# Altium PCB Christmas-2024_TSO-PCB.PcbDoc
Units mil, origin at the board's own origin, x right, y up, seen from the top; angles counter-clockwise.
Board outline 6000 x 4000 mil, 2 copper layers (Top Layer, Bottom Layer); 129 components, 96 nets, 375 pads, 0 vias.
Unrouted connection lines stored in the file: 250.
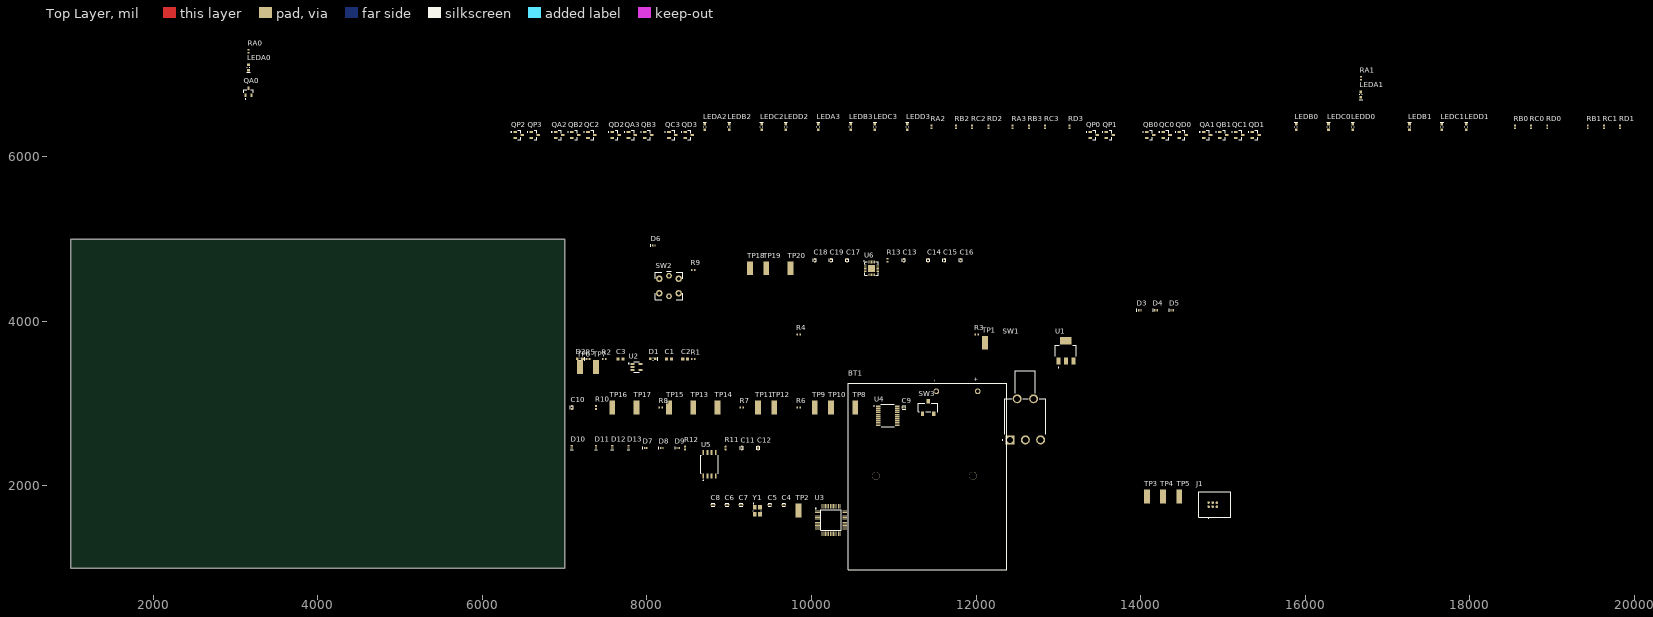
[diagram p0: Top Layer view]
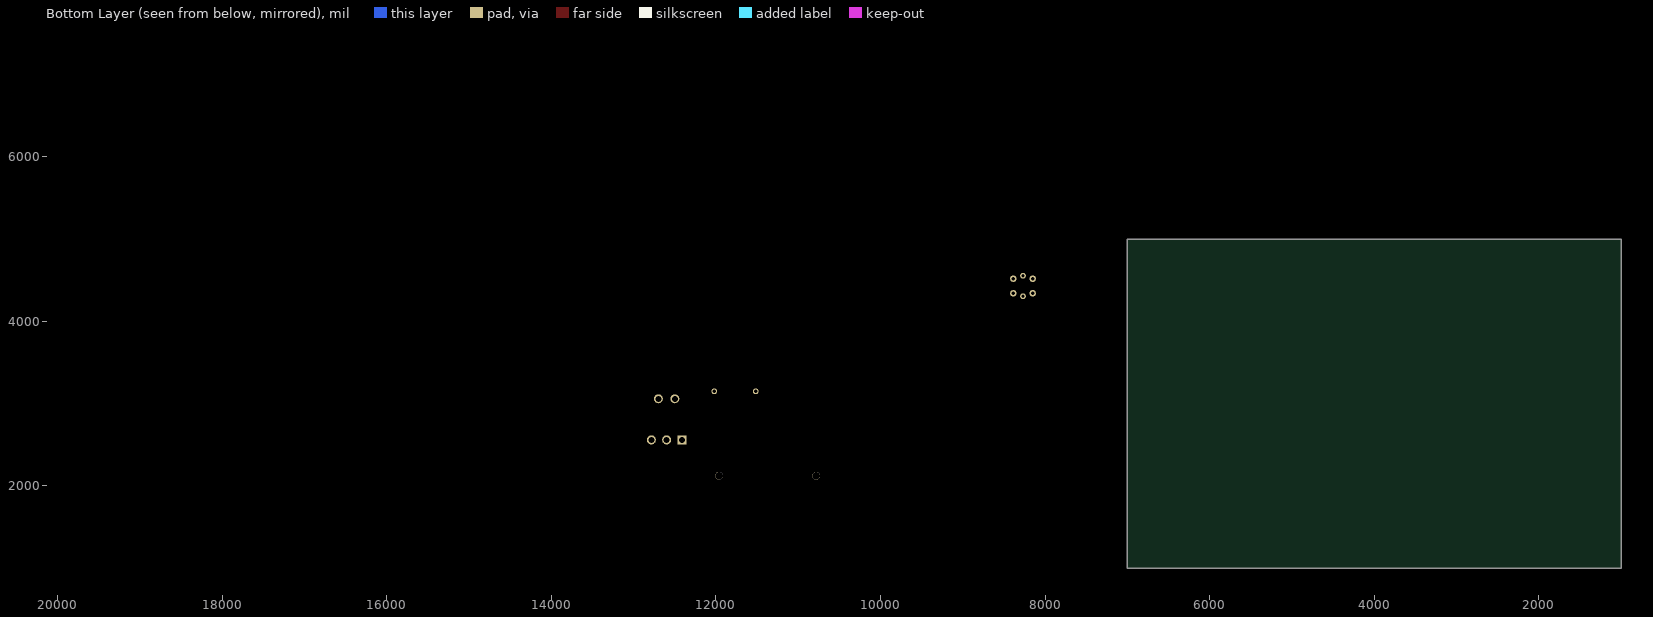
[diagram p1: Bottom Layer view, seen from below]

## Layer stack, top to bottom
Top Solder: solder mask 0.4, Solder Resist, Dk 3.5
Top Layer: signal copper 1.4
Dielectric 1: dielectric 12.6, FR-4, Dk 4.8
Bottom Layer: signal copper 1.4
Bottom Solder: solder mask 0.4, Solder Resist, Dk 3.5

## Board outline
1000,1000 7000,1000 7000,5000 1000,5000

## Design rules (kind name [scope] priority, off if disabled: settings)
Clearance [All] p1: gap=10 ignorepadtopadclearanceinfootprint=FALSE except(0: Arc-Hole Track-Hole SMDPad-Hole THPad-Hole Via-Hole Fill-Hole Poly-Hole Region-Hole Text-Hole)
PolygonConnect [All] p1: connectstyle=Relief reliefconductorwidth=10 reliefentries=4 polygonreliefangle="90 Angle" airgapwidth=10
RoomDefinition SWD [InComponentClass('SWD')] p1: confinementstyle=ConfineIn formatcopy=TRUE lockcomponents=FALSE outline 13929.93,4101.19 13929.93,4168.5 14424.4,4168.5 14424.4,1977.52 15145.83,1977.52 15145.83,1567.76 14653.39,1567.76 14653.39,1767.56 14022.48,1767.56 14022.48,4101.19
RoomDefinition PWR [InComponentClass('PWR')] p2: confinementstyle=ConfineIn formatcopy=TRUE lockcomponents=FALSE outline 7116.97,3506.73 7116.97,3579.88 7607.72,3579.88 7607.72,3583.23 9794.13,3583.23 9794.13,3871.22 12056.26,3871.22 12056.26,3843.66 12158.62,3843.66 12158.62,3830.28 12869.25,3830.28 12869.25,3827.91 13239.33,3827.91 13239.33,3423.07 12869.25,3423.07 12869.25,2483.6 12394.84,2483.6 12394.84,960.67 10424.06,960.67 10424.06,3341.38 7132.72,3341.38 7132.72,3506.73
RoomDefinition Memory-Buffer [InComponentClass('Memory-Buffer')] p3: confinementstyle=ConfineIn formatcopy=TRUE lockcomponents=FALSE outline 7054.37,2908.31 7054.37,2997.2 7349.25,2997.2 7349.25,3001.14 7526.42,3001.14 7526.42,3056.26 11284.21,3056.26 11284.21,3069.12 11550.43,3069.12 11550.43,2836.39 11090.71,2836.39 11090.71,2703.58 10740,2703.58 10740,2849.25 7526.42,2849.25 7526.42,2904.37 7349.25,2904.37 7349.25,2908.31
RoomDefinition MCU [InComponentClass('MCU')] p4: confinementstyle=ConfineIn formatcopy=TRUE lockcomponents=FALSE outline 8758.15,1739.41 8758.15,1803.9 9267.64,1803.9 9267.64,1805.08 9790.28,1805.08 9790.28,1805.16 9894.92,1805.16 9894.92,1803.35 10454.29,1803.35 10454.29,1369.96 10020.91,1369.96 10020.91,1598.15 9790.28,1598.15 9790.28,1604.96 9267.64,1604.96 9267.64,1739.41
RoomDefinition LEDs [InComponentClass('LEDs')] p5: confinementstyle=ConfineIn formatcopy=TRUE lockcomponents=FALSE outline 3080.36,6682.11 3080.36,6872.98 3121.7,6872.98 3121.7,7151.92 3125.63,7151.92 3125.63,7329.08 3190.91,7329.08 3190.91,7151.92 3194.84,7151.92 3194.84,7000.55 16708.62,7000.55 16708.62,6823.39 16712.56,6823.39 16712.56,6434.11 17992.09,6434.11 17992.09,6410 19858.23,6410 19858.23,6313.23 17992.09,6313.23 17992.09,6293.54 15480.87,6293.54 15480.87,6185.28 6333.31,6185.28 6333.31,6682.11
RoomDefinition Flash-Memory [InComponentClass('Flash-Memory')] p6: confinementstyle=ConfineIn formatcopy=TRUE lockcomponents=FALSE outline 7052.96,2414.18 7052.96,2514.95 7809.24,2514.95 7809.24,2509.02 8989.33,2509.02 8989.33,2505.08 9382.64,2505.08 9382.64,2416.18 8989.33,2416.18 8989.33,2412.24 8881.84,2412.24 8881.84,2050.78 8637.84,2050.78 8637.84,2412.24 8431.93,2412.24 8431.93,2414.18
RoomDefinition Button [InComponentClass('Button')] p7: confinementstyle=ConfineIn formatcopy=TRUE lockcomponents=FALSE outline 8024.42,4887.61 8024.42,4954.91 8125.19,4954.91 8125.19,4658.62 8611.38,4658.62 8611.38,4593.35 8448.98,4593.35 8448.98,4247.87 8086.46,4247.87 8086.46,4887.61
RoomDefinition Amplifier [InComponentClass('Amplifier')] p8: confinementstyle=ConfineIn formatcopy=TRUE lockcomponents=FALSE outline 9199.65,4539.41 9199.65,4746.42 10007.13,4746.42 10007.13,4785.79 10892.56,4785.79 10892.56,4789.72 10957.83,4789.72 10957.83,4785.79 11843.27,4785.79 11843.27,4696.89 10957.83,4696.89 10957.83,4692.95 10833.85,4692.95 10833.85,4537.41 10619.72,4537.41 10619.72,4539.41
RoutingVias [All] p1: holewidth=28 width=50 viastyle="Through Hole" minholewidth=28 minwidth=50 maxholewidth=28 maxwidth=50
SolderMaskExpansion [All] p1: expansion=4 istentingtop=FALSE
Width [All] p1: maxlimit=10 minlimit=10 preferedwidth=10
30 further rules are at their usual default settings.

## Classes and differential pairs
component class Memory-Buffer: C9 C10 R6 R7 R8 R10 SW3 TP8 TP9 TP10 TP11 TP12 TP13 TP14 TP15 TP16 TP17 U4
component class Flash-Memory: C11 C12 D7 D8 D9 D10 D11 D12 D13 R11 R12 U5
component class Amplifier: C13 C14 C15 C16 C17 C18 C19 R13 SP1 TP18 TP19 TP20 U6
component class SWD: D3 D4 D5 J1 TP3 TP4 TP5
component class Button: D6 R9 SW2
component class LEDs: LEDA0 LEDA1 LEDA2 LEDA3 LEDB0 LEDB1 LEDB2 LEDB3 LEDC0 LEDC1 LEDC2 LEDC3 LEDD0 LEDD1 LEDD2 LEDD3 QA0 QA1 QA2 QA3 QB0 QB1 QB2 QB3 QC0 QC1 QC2 QC3 QD0 QD1 QD2 QD3 QP0 QP1 QP2 QP3 RA0 RA1 RA2 RA3 RB0 RB1 RB2 RB3 RC0 RC1 RC2 RC3 RD0 RD1 RD2 RD3
component class PWR: BT1 C1 C2 C3 D1 D2 R1 R2 R3 R4 R5 SW1 TP1 TP6 TP7 U1 U2
component class MCU: C4 C5 C6 C7 C8 TP2 U3 Y1

## Components (designator, comment, footprint, x,y, rotation, side; value= is the part's Value field where it differs from the comment)
BT1 "BC3AAPC" BAT_BC3AAPC 11409.45,2113.39 r90 top
C1 "CAP" 0603C 8267.72,3543.31 r0 top value=10uF
C2 "CAP" 0603C 8464.57,3543.31 r0 top value=10uF
C3 "CAP" 0603C 7677.17,3543.31 r0 top value=10uF
C4 "CAP" 0402C 9662.6,1771.65 r0 top value=0.1uF
C5 "CAP" 0402C 9492.6,1771.65 r0 top value=4pF
C6 "CAP" 0402C 8972.6,1771.65 r0 top value=0.1uF
C7 "CAP" 0402C 9142.6,1771.65 r0 top value=4.7uF
C8 "CAP" 0402C 8802.6,1771.65 r0 top value=4pF
C9 "CAP" 0402C 11122.05,2952.76 r0 top value=0.1uF
C10 "CAP" 0402C 7086.61,2952.76 r90 top value=0.1uF
C11 "CAP" 0402C 9153.54,2460.63 r90 top value=0.1uF
C12 "CAP" 0402C 9350.39,2460.63 r90 top value=4.7uF
C13 "CAP" 0402C 11122.05,4741.34 r90 top value=0.1uF
C14 "CAP" 0402C 11417.32,4741.34 r90 top value=0.1uF
C15 "CAP" 0402C 11614.17,4741.34 r90 top value=4.7uF
C16 "CAP" 0402C 11811.02,4741.34 r90 top value=4.7uF
C17 "CAP" 0402C 10433.07,4741.34 r90 top value=DNS
C18 "CAP" 0402C 10039.37,4741.34 r90 top value=DNS
C19 "CAP" 0402C 10236.22,4741.34 r90 top value=DNS
D1 "LED - GREEN" "LED - 0603 - GREEN" 8070.87,3543.31 r0 top
D2 "LED - RED" "LED - 0603 - RED" 7185.04,3543.31 r0 top
D3 "DESD3V3E1BL-7B" 0402-TVS 13976.38,4134.84 r0 top
D4 "DESD3V3E1BL-7B" 0402-TVS 14173.23,4134.84 r0 top
D5 "DESD3V3E1BL-7B" 0402-TVS 14370.08,4134.84 r0 top
D6 "DESD3V3E1BL-7B" 0402-TVS 8070.87,4921.26 r0 top
D7 "DESD3V3E1BL-7B" 0402-TVS 7972.44,2460.63 r0 top
D8 "DESD3V3E1BL-7B" 0402-TVS 8169.29,2460.63 r0 top
D9 "DESD3V3E1BL-7B" 0402-TVS 8366.14,2460.63 r0 top
D10 "DESD3V3E1BL-7B" 0402-TVS 7086.61,2460.63 r90 top
D11 "DESD3V3E1BL-7B" 0402-TVS 7381.89,2460.63 r90 top
D12 "DESD3V3E1BL-7B" 0402-TVS 7578.74,2460.63 r90 top
D13 "DESD3V3E1BL-7B" 0402-TVS 7775.59,2460.63 r90 top
J1 "TC2030-IDC" "TAG CONNECT TC2030IDC - NO 3D MODEL" 14862.2,1772.64 r0 top value=DNS
LEDA0 "LED - ORANGE" "LED - 0603 - ORANGE" 3158.27,7083.85 r270 top
LEDA1 "LED - ORANGE" "LED - 0603 - ORANGE" 16675.98,6755.31 r270 top
LEDA2 "LED - ORANGE" "LED - 0603 - ORANGE" 8703.54,6361.61 r90 top
LEDA3 "LED - ORANGE" "LED - 0603 - ORANGE" 10081.5,6361.61 r90 top
LEDB0 "LED - BLUE" "LED - 0603 - BLUE" 15888.58,6361.61 r90 top
LEDB1 "LED - BLUE" "LED - 0603 - BLUE" 17266.54,6361.61 r90 top
LEDB2 "LED - BLUE" "LED - 0603 - BLUE" 8998.82,6361.61 r90 top
LEDB3 "LED - BLUE" "LED - 0603 - BLUE" 10475.2,6361.61 r90 top
LEDC0 "LED - RED" "LED - 0603 - RED" 16282.28,6361.61 r90 top
LEDC1 "LED - RED" "LED - 0603 - RED" 17660.24,6361.61 r90 top
LEDC2 "LED - RED" "LED - 0603 - RED" 9392.52,6361.61 r90 top
LEDC3 "LED - RED" "LED - 0603 - RED" 10770.47,6361.61 r90 top
LEDD0 "LED - YELLOW" "LED - 0603" 16577.56,6361.61 r90 top
LEDD1 "LED - YELLOW" "LED - 0603" 17955.51,6361.61 r90 top
LEDD2 "LED - YELLOW" "LED - 0603" 9687.8,6361.61 r90 top
LEDD3 "LED - YELLOW" "LED - 0603" 11164.17,6361.61 r90 top
QA0 "NMOS" SOT-23 3158.27,6788.57 r90 top
QA1 "NMOS" SOT-23 14805.91,6263.19 r0 top
QA2 "NMOS" SOT-23 6931.89,6263.19 r0 top
QA3 "NMOS" SOT-23 7817.72,6263.19 r0 top
QB0 "NMOS" SOT-23 14116.93,6263.19 r0 top
QB1 "NMOS" SOT-23 15002.76,6263.19 r0 top
QB2 "NMOS" SOT-23 7128.74,6263.19 r0 top
QB3 "NMOS" SOT-23 8014.57,6263.19 r0 top
QC0 "NMOS" SOT-23 14313.78,6263.19 r0 top
QC1 "NMOS" SOT-23 15199.61,6263.19 r0 top
QC2 "NMOS" SOT-23 7325.59,6263.19 r0 top
QC3 "NMOS" SOT-23 8309.84,6263.19 r0 top
QD0 "NMOS" SOT-23 14510.63,6263.19 r0 top
QD1 "NMOS" SOT-23 15396.46,6263.19 r0 top
QD2 "NMOS" SOT-23 7620.87,6263.19 r0 top
QD3 "NMOS" SOT-23 8506.69,6263.19 r0 top
QP0 "NMOS" SOT-23 13427.95,6263.19 r0 top
QP1 "NMOS" SOT-23 13624.8,6263.19 r0 top
QP2 "NMOS" SOT-23 6439.76,6263.19 r0 top
QP3 "NMOS" SOT-23 6636.61,6263.19 r0 top
R1 "RES" 0402R 8562.99,3543.31 r0 top value=160k
R2 "RES" 0402R 7480.32,3543.31 r0 top value=200k
R3 "RES" 0402R 12007.87,3838.58 r0 top value=10k
R4 "RES" 0402R 9842.52,3838.58 r0 top value=5
R5 "RES" 0402R 7283.46,3543.31 r0 top value=4.7k
R6 "RES" 0402R 9842.52,2952.76 r0 top value=22
R7 "RES" 0402R 9153.54,2952.76 r0 top value=22
R8 "RES" 0402R 8169.29,2952.76 r0 top value=22
R9 "RES" 0402R 8562.99,4625.98 r0 top value=2.2k
R10 "RES" 0402R 7381.89,2952.76 r90 top value=4.7k
R11 "RES" 0402R 8956.69,2460.63 r90 top value=4.7k
R12 "RES" 0402R 8464.57,2460.63 r90 top value=4.7k
R13 "RES" 0402R 10925.2,4741.34 r90 top value=100k
RA0 "RES" 0402R 3158.27,7280.7 r90 top value=260
RA1 "RES" 0402R 16675.98,6952.17 r90 top value=260
RA2 "RES" 0402R 11459.45,6361.61 r90 top value=260
RA3 "RES" 0402R 12443.7,6361.61 r90 top value=260
RB0 "RES" 0402R 18546.06,6361.61 r90 top value=20
RB1 "RES" 0402R 19431.89,6361.61 r90 top value=20
RB2 "RES" 0402R 11754.72,6361.61 r90 top value=20
RB3 "RES" 0402R 12640.55,6361.61 r90 top value=20
RC0 "RES" 0402R 18742.91,6361.61 r90 top value=260
RC1 "RES" 0402R 19628.74,6361.61 r90 top value=260
RC2 "RES" 0402R 11951.57,6361.61 r90 top value=260
RC3 "RES" 0402R 12837.4,6361.61 r90 top value=260
RD0 "RES" 0402R 18939.76,6361.61 r90 top value=260
RD1 "RES" 0402R 19825.59,6361.61 r90 top value=260
RD2 "RES" 0402R 12148.43,6361.61 r90 top value=260
RD3 "RES" 0402R 13132.68,6361.61 r90 top value=260
SW1 "SPDT TOGGLE SWITCH" SW_100SP1T2B4M6QE 12598.43,2559.06 r0 top
SW2 "SPDT PUSH BUTTON SWITCH" TL1265RQSCLR 8267.72,4429.13 r0 top
SW3 "SPDT SLIDE SWITCH" CJS-1200TB 11417.32,2952.76 r0 top
TP1 "RCWCTE" RCWCTE 12106.3,3740.16 r90 top
TP2 "RCWCTE" RCWCTE 9842.6,1701.65 r90 top
TP3 "RCWCTE" RCWCTE 14074.8,1871.06 r90 top
TP4 "RCWCTE" RCWCTE 14271.65,1871.06 r90 top
TP5 "RCWCTE" RCWCTE 14468.5,1871.06 r90 top
TP6 "RCWCTE" RCWCTE 7185.04,3444.88 r90 top
TP7 "RCWCTE" RCWCTE 7381.89,3444.88 r90 top
TP8 "RCWCTE" RCWCTE 10531.5,2952.76 r90 top
TP9 "RCWCTE" RCWCTE 10039.37,2952.76 r90 top
TP10 "RCWCTE" RCWCTE 10236.22,2952.76 r90 top
TP11 "RCWCTE" RCWCTE 9350.39,2952.76 r90 top
TP12 "RCWCTE" RCWCTE 9547.24,2952.76 r90 top
TP13 "RCWCTE" RCWCTE 8562.99,2952.76 r90 top
TP14 "RCWCTE" RCWCTE 8858.27,2952.76 r90 top
TP15 "RCWCTE" RCWCTE 8267.72,2952.76 r90 top
TP16 "RCWCTE" RCWCTE 7578.74,2952.76 r90 top
TP17 "RCWCTE" RCWCTE 7874.02,2952.76 r90 top
TP18 "RCWCTE" RCWCTE 9251.97,4642.91 r90 top
TP19 "RCWCTE" RCWCTE 9448.82,4642.91 r90 top
TP20 "RCWCTE" RCWCTE 9744.09,4642.91 r90 top
U1 "AZ1117IH-3.3TRG1" SOT-223-3 13090.55,3641.73 r90 top
U2 "2.0V" SOT-23-5 7874.02,3444.88 r0 top
U3 "STM32G031C8T6" 48-LQFP 10237.6,1586.65 r0 top
U4 "74LVC244APW,118" 20-TSSOP 10925.2,2854.33 r0 top
U5 "WINBOND NOR FLASH MEM" 8-SOIC 8759.84,2263.78 r90 top
U6 "NAU8315YG" 20-WFQFN-EP 10728.35,4642.91 r0 top
Y1 "16MHz" 4-SMD_NL 9342.6,1696.65 r0 top

## Footprints (in the part's own frame and the unit in brackets; to place one, negate y for a bottom-side part, rotate by r counter-clockwise, add the part's x,y. Pads: shape width x height; smd on the part's side, far side on the other; paste and mask are expansions set on the pad)
4-SMD_NL [mm]
  rect 1.15x1.4 smd: 1(-0.8,1.1) 2(-0.8,-1.1) 3(0.8,-1.1) 4(0.8,1.1)
  silkscreen extent -1.3,-0.08 1.25,2.4, body extent -1.25,-1.6 1.25,1.6, height 0.75
8-SOIC [mil]
  rect 60x21 smd paste+0: 1(-143.5,75) 2(-143.5,25) 3(-143.5,-25) 4(-143.5,-75) 5(143.5,-75) 6(143.5,-25) 7(143.5,25) 8(143.5,75)
  silkscreen extent -198,-109 109,109, body extent -156,-104 156,104, height 85
20-TSSOP [mm]
  rrect50% 1.475x0.45 smd mask+0.051: 1(-2.938,2.925) 2(-2.938,2.275) 3(-2.938,1.625) 4(-2.938,0.975) 5(-2.938,0.325) 6(-2.938,-0.325) 7(-2.938,-0.975) 8(-2.938,-1.625) 9(-2.938,-2.275) 10(-2.938,-2.925) 11(2.938,-2.925) 12(2.938,-2.275) 13(2.938,-1.625) 14(2.938,-0.975) 15(2.938,-0.325) 16(2.938,0.325) 17(2.938,0.975) 18(2.938,1.625) 19(2.938,2.275) 20(2.938,2.925)
  silkscreen extent -4.3,-3.5 2.05,3.5, body extent -3.2,-3.25 3.2,3.25, height 1.13
20-WFQFN-EP [mm]
  rect 0.85x0.28 smd mask+0.051: 1(-1.95,1) 2(-1.95,0.5) 3(-1.95,0) 4(-1.95,-0.5) 5(-1.95,-1) 11(1.95,-1) 12(1.95,-0.5) 13(1.95,0) 14(1.95,0.5) 15(1.95,1)
  rect 0.28x0.85 smd mask+0.051: 6(-1,-1.95) 7(-0.5,-1.95) 8(0,-1.95) 9(0.5,-1.95) 10(1,-1.95) 16(1,1.95) 17(0.5,1.95) 18(0,1.95) 19(-0.5,1.95) 20(-1,1.95)
  rect 2.1x2.1 smd mask+0.051: 21(0,0)
  silkscreen extent -2.38,-2.1 2.1,2.38, body extent -2.05,-2.05 2.05,2.05, height 0.8
48-LQFP [mm]
  rect 1.475x0.28 smd mask+0.03: 1(-4.238,2.75) 2(-4.238,2.25) 3(-4.238,1.75) 4(-4.238,1.25) 5(-4.238,0.75) 6(-4.238,0.25) 7(-4.238,-0.25) 8(-4.238,-0.75) 9(-4.238,-1.25) 10(-4.238,-1.75) 11(-4.238,-2.25) 12(-4.238,-2.75) 25(4.238,-2.75) 26(4.238,-2.25) 27(4.238,-1.75) 28(4.238,-1.25) 29(4.238,-0.75) 30(4.238,-0.25) 31(4.238,0.25) 32(4.238,0.75) 33(4.238,1.25) 34(4.238,1.75) 35(4.238,2.25) 36(4.238,2.75)
  rect 0.28x1.475 smd mask+0.03: 13(-2.75,-4.238) 14(-2.25,-4.238) 15(-1.75,-4.238) 16(-1.25,-4.238) 17(-0.75,-4.238) 18(-0.25,-4.238) 19(0.25,-4.238) 20(0.75,-4.238) 21(1.25,-4.238) 22(1.75,-4.238) 23(2.25,-4.238) 24(2.75,-4.238) 37(2.75,4.238) 38(2.25,4.238) 39(1.75,4.238) 40(1.25,4.238) 41(0.75,4.238) 42(0.25,4.238) 43(-0.25,4.238) 44(-0.75,4.238) 45(-1.25,4.238) 46(-1.75,4.238) 47(-2.25,4.238) 48(-2.75,4.238)
  silkscreen extent -4.85,-3.15 3.15,3.62, body extent -4.5,-4.5 4.5,4.5, height 1.6
0402-TVS [mm]
  rect 0.4x0.7 smd mask+0.076: 1(-0.025,0) 2(0.675,0)
  silkscreen extent -0.6,-0.4 -0.6,0.4, body extent -0.18,-0.3 0.82,0.3, height 0.53
0402C [mm] "0402 SMT Capacitor"
  rrect53% 0.54x0.6 smd: 1(-0.43,0) 2(0.43,0)
  silkscreen extent -0.5,-0.48 0.5,0.48, body extent -0.5,-0.25 0.5,0.25, height 0.5
0402R [mm] "0402 SMT Resistor"
  rrect20% 0.49x0.6 smd: 1(-0.455,0) 2(0.455,0)
  body extent -0.75,-0.25 0.75,0.25, height 0.35
0603C [mm]
  rect 0.96x0.97 smd: 1(-0.755,0) 2(0.755,0)
  body extent -0.8,-0.47 0.8,0.48, height 0.8
BAT_BC3AAPC [mm]
  round 1.755 hole 1.17: NEG(26.32,-2.7) POS(26.32,-15.5)
  round 2.37 hole 2.37 unplated: ""(0.25,16) ""(0.25,-14)
  silkscreen extent -28.75,-24.5 28.75,24.5, body extent -28.75,-24.5 28.75,24.5, height 16.5
CJS-1200TB [mm]
  rect 1x1.3 smd: 1(-1.75,-1.95) 2(0,1.95) 3(1.75,-1.95)
  silkscreen extent -3,-1.25 3,1.25, body extent -2.7,-2.1 2.7,2.1, height 2.47
"LED - 0603" [mm]
  rect 0.8x0.8 smd: 1(-0.8,0) 2(0.8,0)
  silkscreen extent -0.08,-0.51 1.52,0.51, body extent -0.8,-0.35 0.8,0.35, height 0.7
"LED - 0603 - BLUE" [mm]
  rect 0.8x0.8 smd: 1(-0.8,0) 2(0.8,0)
  silkscreen extent -0.08,-0.51 1.52,0.51, body extent -0.8,-0.4 0.8,0.4, height 0.7
"LED - 0603 - GREEN" [mm]
  rect 0.8x0.8 smd: 1(-0.8,0) 2(0.8,0)
  silkscreen extent -0.08,-0.51 1.52,0.51, body extent -0.8,-0.4 0.8,0.4, height 0.7
"LED - 0603 - ORANGE" [mm]
  rect 0.8x0.8 smd: 1(-0.8,0) 2(0.8,0)
  silkscreen extent -0.08,-0.51 1.52,0.51, body extent -0.8,-0.4 0.8,0.4, height 0.7
"LED - 0603 - RED" [mm]
  rect 0.8x0.8 smd: 1(-0.8,0) 2(0.8,0)
  silkscreen extent -0.08,-0.51 1.52,0.51, body extent -0.8,-0.4 0.8,0.4, height 0.7
RCWCTE [mm]
  rect 4.2x1.8 smd: 1(0,0)
  body extent -1.6,-0.8 1.6,0.8, height 2.01
SOT-23 [mm]
  rect 1.09x0.61 smd: 1(-1.07,0.915) 2(-1.07,-0.915) 3(1.07,0)
  silkscreen extent -2.35,-1.45 0.65,1.45, body extent -1.2,-1.45 1.2,1.45, height 1.2
SOT-23-5 [mm]
  rrect25% 1.21x0.59 smd: 1(-1.255,0.95) 2(-1.255,0) 3(-1.255,-0.95) 4(1.255,-0.95) 5(1.255,0.95)
  silkscreen extent -2.51,-1.57 0.8,1.57, body extent -1.4,-1.45 1.4,1.45, height 1.43
SOT-223-3 [mm]
  rect 2.2x1.2 smd: 1(-3.1,2.3) 2(-3.1,0) 3(-3.1,-2.3)
  rect 2.2x3.5 smd: 4(3.1,0)
  silkscreen extent -5.2,-3.25 1.75,3.25, body extent -3.5,-3.3 3.5,3.2, height 1.8
SW_100SP1T2B4M6QE [mm]
  rect 2.775x2.775 / inner round 2.775 / far side rect 2.775x2.775 hole 1.85: 1(-4.7,0)
  round 2.775 hole 1.85: 2(0,0) 3(4.7,0) S1(-2.54,12.7) S2(2.54,12.7)
  silkscreen extent -7.2,-0.1 6.35,21.35, body extent -6.35,-0.64 6.35,26.51, height 6.86
"TAG CONNECT TC2030IDC - NO 3D MODEL" [mil]
  round 30.83 smd: 1(-37.52,-25) 2(-37.52,25) 3(12.48,-25) 4(12.48,25) 5(62.52,-25) 6(62.52,25)
  round 48.25 hole 96.5 unplated: 7(-87.52,-100) 9(-87.52,100) 10(37.48,-100) 11(37.48,100)
  round 21 hole 42.01 unplated: 8(-87.52,0) 12(112.48,-40) 13(112.48,40)
  silkscreen extent -157,-167 232,154
TL1265RQSCLR [mm]
  round 2 hole 1.2 unplated: 1(3,-2.25) 2(-3,-2.25) 3(3,2.25) 4(-3,2.25)
  round 1.8 hole 1 unplated: 5(0,-3.15) 6(0,3.15)
  silkscreen extent -4.25,-4.25 4.25,4.5, body extent -3.97,-4.05 4.03,3.95, height 11.6

## Part data
BT1: "Holder Batt 3-AA Cells Pc Mnt", MFR="MPD (Memory Protection Devices)", MFR PN=BC3AAPC, Type=TH
C1 C2 C3 C4 C5 C6 C7 C8 C9 C10 C11 C12 C13 C14 C15 C16 C17 C18 C19: "Capacitor", Type=SMD
D1: "LED, Green, 0603", Color=Green, MFR=Dialight, MFR PN=5988070107F, Type=SMD, Vf=2V
D2 LEDC0 LEDC1 LEDC2 LEDC3: "LED, Red, 0603", Color=Red, MFR="Würth Elektronik", MFR PN=150060RS75000, Type=SMD, Vf=2V
D3 D4 D5 D6 D7 D8 D9 D10 D11 D12 D13: library part "TVS Diode 3.3V Bi", "TVS DIODE 3.3VWM 7VC DFN1006-2", MFR="Diodes Incorporated", MFR PN=DESD3V3E1BL-7B, Type=SMD, VBR=3.8V, VC=7V, VRS=3.3V
J1: "\"Plug of Nails\" POGO Pin connector", MFR=Tag-Connect, MFR PN=TC2030-IDC-NL
LEDA0 LEDA1 LEDA2 LEDA3: "LED, Orange, 0603", Color=Orange, MFR="Lite-On Inc.", MFR PN=LTST-C190KFKT, Type=SMD, Vf=2V
LEDB0 LEDB1 LEDB2 LEDB3: "LED, Blue, 0603", Color=Blue, MFR="Würth Elektronik", MFR PN=150060BS75000, Type=SMD, Vf=3.2V
LEDD0 LEDD1 LEDD2 LEDD3: "LED, Yellow, 0603", Color=Yellow, MFR="Würth Elektronik", MFR PN=150060YS75000, Type=SMD, Vf=2V
QA0 QA1 QA2 QA3 QB0 QB1 QB2 QB3 QC0 QC1 QC2 QC3 QD0 QD1 QD2 QD3 QP0 QP1 QP2 QP3: "N-Channel MOSFET", MFR="Diodes Incorporated", MFR PN=DMN63D8L-7, Type=SMD
R1: "Resistor", MFR=YAGEO, MFR PN=RT0402BRD07160KL, Tolerance=0.1%, Type=SMD
R2: "Resistor", MFR=YAGEO, MFR PN=RT0402BRD07200KL, Tolerance=0.1%, Type=SMD
R3 R4 R5 R6 R7 R8 R9 R10 R11 R12 R13 RA0 RA1 RA2 RA3 RB0 RB1 RB2 RB3 RC0 RC1 RC2 RC3 RD0 RD1 RD2 RD3: "Resistor", Type=SMD
SW1: "Toggle Switch, 100 Series, SPDT, ON-NONE-ON, Sealed, 5A, 120VAC, 28VDC, R/A PC", MFR=E-Switch, MFR PN=100SP1T2B4M6QE, Type=TH
SW2: "SWITCH TACTILE SPST-NO 0.05A 12V, Red Illumination", MFR=E-Switch, MFR PN=TL1265RQSCLR, Type=SMD
SW3: MFR="Nidec Components Corporation", MFR PN=CJS-1200TB, Type=SMD
TP1 TP2 TP3 TP4 TP5 TP6 TP7 TP8 TP9 TP10 TP11 TP12 TP13 TP14 TP15 TP16 TP17 TP18 TP19 TP20: library part "TEST POINT", "Test Point, Surface Mount", MFR="KOA Speer Electronics, Inc.", MFR PN=RCWCTE, Type=SMD
U1: library part "LIN REG 3.3V 1A", "IC REG LINEAR 3.3V 1A SOT223", MFR="Texas Instruments", MFR PN=LM3940IMPX-3.3/NOPB, Type=SMD
U2: library part "SUPERVISOR 2V AL OD", "Low-voltage supervisor with adjustable-reset time delay and manual reset", MFR="Texas Instruments", MFR PN=TLV840NADL20DBVR, Type=SMD
U3: library part STM32G031C6T6, "STM32G031C6T6 - ARM MCU, STM32 Family STM32G0 Series Microcontrollers, ARM Cortex-M0+, 32bit, 64 MHz, 64 KB, 8 KB", MFR=STMicroelectronics, MFR PN=STM32G031C8T6, Type=SMD
U4: library part "TRI-STATE BUFFERS 8 CIRC", "NXP 74LVC244APW,115 Octal Buffer & Line Driver, 3-State, 1.2  3.6 V, 20-Pin TSSOP", MFR=Nexperia, MFR PN=74LVC244APW,118, Type=SMD
U5: "FLASH - NOR Memory IC SPI, 128 Mbit", MFR=Winbond, MFR PN=W25Q128JVSIM, Type=SMD
U6: library part "I2S 3W AMP", "I2S MONO 3.2W CLASS-D AMPLIFIER", MFR=Nuvoton, Power Rating=3.2W, MFR PN=NAU8315YG, Type=SMD
Y1: library part "16 MHz XTAL", "CRYSTAL 16.0000MHZ 9PF SMD", MFR=EPSON, MFR PN="TSX-3225 16.0000MF09Z-AC0", Frequency=16MHz, Type=SMD

## Nets (pads, with @x,y where several pads share a name; then routed paths per layer and width w, separated by ;. In a path a pad name is that pad's centre, name@x,y a point inside that pad or via, vN(x,y) a via of type N, cw(c..) or ccw(c..) an arc to the next point about the centre after c; other vN are vias at no path point)
3.3V: C1.2 C2.2 C6.2 C7.2 C9.2 C11.2 C12.2 D10.1 J1.1 R3.2 R5.2 R9.1 R11.2 R13.2 RA0.2 RA1.2 RA2.2 RA3.2 RB0.2 RB1.2 RB2.2 RB3.2 RC0.2 RC1.2 RC2.2 RC3.2 RD0.2 RD1.2 RD2.2 RD3.2 SW3.3 TP1.1 U1.3 U3.4 U3.5 U3.6 U4.20 U5.8
AMP_ENABLE: U3.38 U6.3
BUFFER_nEN: C10.2 R10.2 SW3.2 U4.1 U4.19
GND: BT1.NEG C1.1 C2.1 C3.1 C4.1 C5.1 C6.1 C7.1 C8.1 C9.1 C10.1 C11.1 C12.1 C13.1 C14.1 C15.1 C16.1 C18.1 C19.1 D1.2 D3.2 D4.2 D5.2 D6.2 D7.2 D8.2 D9.2 D10.2 D11.2 D12.2 D13.2 J1.5 QP0.2 QP1.2 QP2.2 QP3.2 R2.1 R10.1 R12.1 SW2.3 SW2.5 TP6.1 TP7.1 U1.2 U1.4 U2.3 U2.4 U2.5 U3.7 U4.10 U5.4 U6.1 U6.4 U6.5 U6.8 U6.10 U6.12 U6.15 U6.17 U6.18 U6.19 U6.21
HSE_IN: C5.2 U3.8 Y1.2
HSE_OUT: C8.2 U3.9 Y1.1
I2S_CLK: TP18.1 U3.12 U6.6
I2S_DATA: TP19.1 U3.13 U6.9
I2S_WS: TP20.1 U3.37 U6.7
LED0: QA0.1 U3.19
LED1: QB0.1 U3.20
LED2: QC0.1 U3.21
LED3: QD0.1 U3.42
LED4: QA1.1 U3.43
LED5: QB1.1 U3.44
LED6: QC1.1 U3.45
LED7: QD1.1 U3.46
LED8: QA2.1 U3.47
LED9: QB2.1 U3.48
LED10: QC2.1 U3.22
LED11: QD2.1 U3.23
LED12: QA3.1 U3.24
LED13: QB3.1 U3.25
LED14: QC3.1 U3.26
LED15: QD3.1 U3.27
LOW_BATT: D2.2 U2.1
MEM_nRST: U3.18 U4.17
MEM_nRST_BUFF: D13.1 R11.1 TP15.1 U4.3 U5.7
MEM_nWP: U3.17 U4.2
MEM_nWP_BUFF: D9.1 R12.2 TP8.1 U4.18 U5.3
NetC3_2: C3.2 R4.1
NetC17_1: C17.1 C18.2 U6.16
NetC17_2: C17.2 C19.2 U6.20
NetD1_1: D1.1 R3.1
NetD2_1: D2.1 R5.1
NetD6_1: D6.1 SW2.1 U3.39
NetLEDA0_1: LEDA0.1 RA0.1
NetLEDA0_2: LEDA0.2 QA0.3
NetLEDA1_1: LEDA1.1 RA1.1
NetLEDA1_2: LEDA1.2 QA1.3
NetLEDA2_1: LEDA2.1 RA2.1
NetLEDA2_2: LEDA2.2 QA2.3
NetLEDA3_1: LEDA3.1 RA3.1
NetLEDA3_2: LEDA3.2 QA3.3
NetLEDB0_1: LEDB0.1 RB0.1
NetLEDB0_2: LEDB0.2 QB0.3
NetLEDB1_1: LEDB1.1 RB1.1
NetLEDB1_2: LEDB1.2 QB1.3
NetLEDB2_1: LEDB2.1 RB2.1
NetLEDB2_2: LEDB2.2 QB2.3
NetLEDB3_1: LEDB3.1 RB3.1
NetLEDB3_2: LEDB3.2 QB3.3
NetLEDC0_1: LEDC0.1 RC0.1
NetLEDC0_2: LEDC0.2 QC0.3
NetLEDC1_1: LEDC1.1 RC1.1
NetLEDC1_2: LEDC1.2 QC1.3
NetLEDC2_1: LEDC2.1 RC2.1
NetLEDC2_2: LEDC2.2 QC2.3
NetLEDC3_1: LEDC3.1 RC3.1
NetLEDC3_2: LEDC3.2 QC3.3
NetLEDD0_1: LEDD0.1 RD0.1
NetLEDD0_2: LEDD0.2 QD0.3
NetLEDD1_1: LEDD1.1 RD1.1
NetLEDD1_2: LEDD1.2 QD1.3
NetLEDD2_1: LEDD2.1 RD2.1
NetLEDD2_2: LEDD2.2 QD2.3
NetLEDD3_1: LEDD3.1 RD3.1
NetLEDD3_2: LEDD3.2 QD3.3
NetQA0_2: QA0.2 QB0.2 QC0.2 QD0.2 QP0.3
NetQA1_2: QA1.2 QB1.2 QC1.2 QD1.2 QP1.3
NetQA2_2: QA2.2 QB2.2 QC2.2 QD2.2 QP2.3
NetQA3_2: QA3.2 QB3.2 QC3.2 QD3.2 QP3.3
NetR1_1: R1.1 R2.2 U2.2
NetR1_2: R1.2 R4.2 SW1.1 U1.1
NetR6_1: R6.1 U4.14
NetR7_1: R7.1 U4.12
NetR8_1: R8.1 U4.7
NetR9_2: R9.2 SW2.6
NetR13_1: R13.1 U6.13
NetTP2_1: TP2.1 U3.1
nRST: C4.2 D3.1 J1.3 TP3.1 U3.10
PWM0: QP0.1 U3.31
PWM1: QP1.1 U3.30
PWM2: QP2.1 U3.29
PWM3: QP3.1 U3.28
SPI_CLK: TP13.1 U3.11 U4.8
SPI_CLK_BUFF: D12.1 R7.2 TP14.1 U5.6
SPI_CS: TP9.1 U3.16 U4.4
SPI_CS_BUFF: D7.1 TP10.1 U4.16 U5.1
SPI_MISO: R8.2 TP17.1 U3.14
SPI_MISO_BUFF: D8.1 TP16.1 U4.13 U5.2
SPI_MOSI: TP11.1 U3.15 U4.6
SPI_MOSI_BUFF: D11.1 R6.2 TP12.1 U5.5
SWD_CLK: D4.1 J1.4 TP5.1 U3.36
SWD_IO: D5.1 J1.2 TP4.1 U3.35
VBATT: BT1.POS C13.2 C14.2 C15.2 C16.2 SW1.2 U6.2 U6.11 U6.14
pads on no net: BT1. J1.6 J1.7 J1.8 J1.9 J1.10 J1.11 J1.12 J1.13 SW1.3 SW1.S1 SW1.S2 SW2.2 SW2.4 SW3.1 U3.2 U3.3 U3.32 U3.33 U3.34 U3.40 U3.41 U4.5 U4.9 U4.11 U4.15 Y1.3 Y1.4

## Text inside footprints (layer, text, board x,y; h text height)
BT1: Top Overlay "+" at 12019.68,3264.96 h50 r90; Top Overlay "-" at 11515.75,3264.96 h50 r90